# EAGLE board FM_player_v2 (EAGLE 6.1)
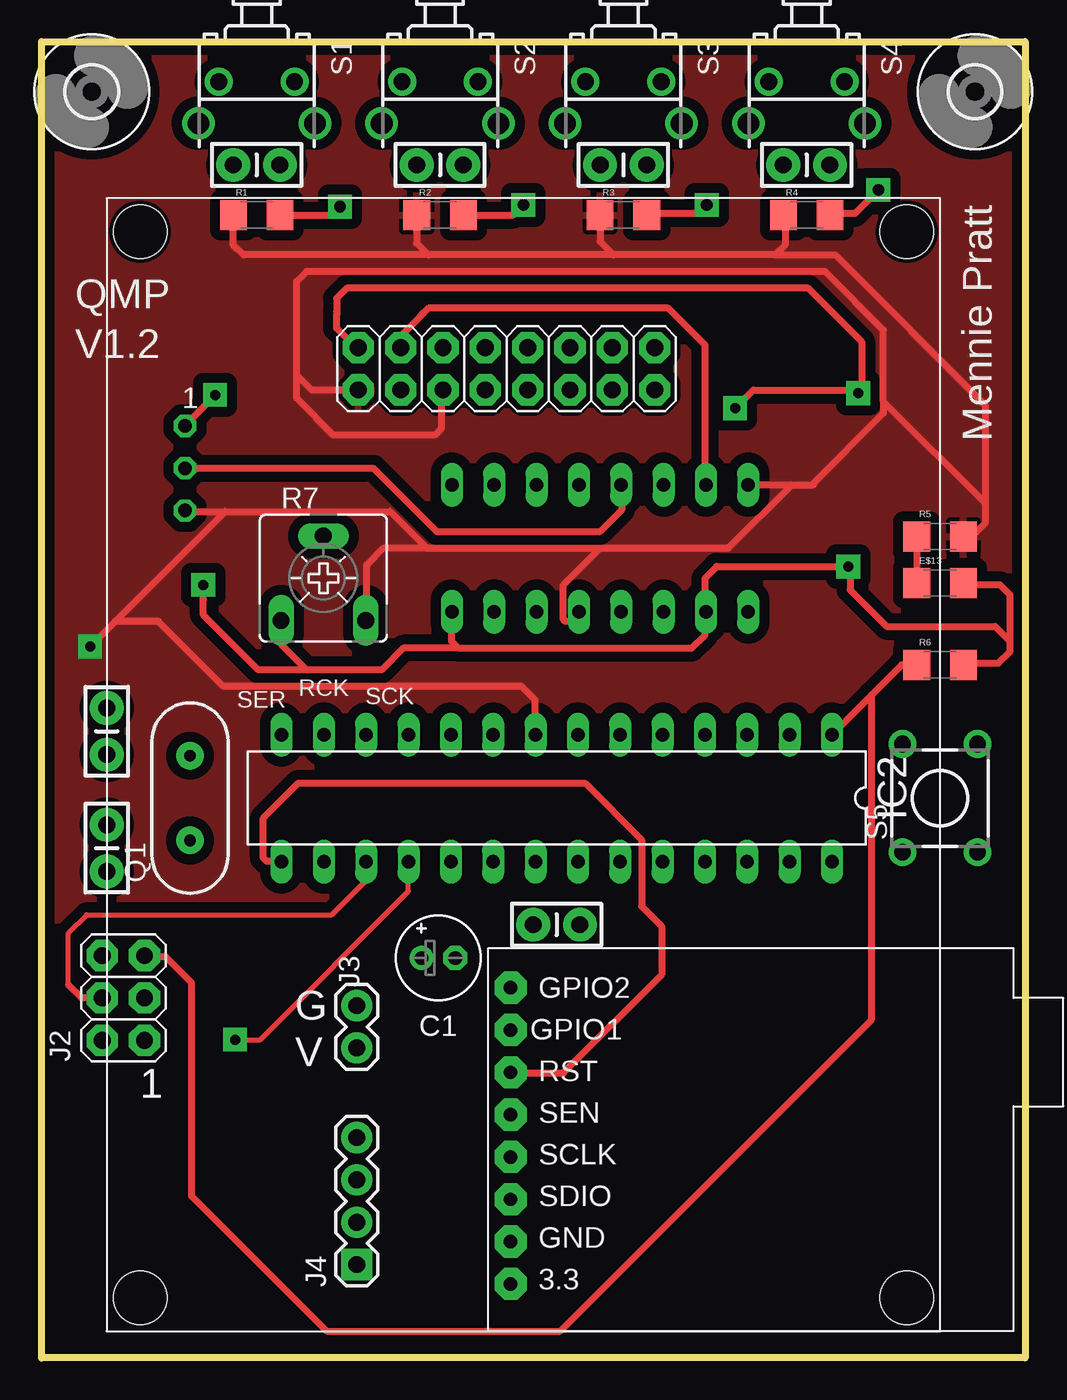
[diagram p0: board, top side]
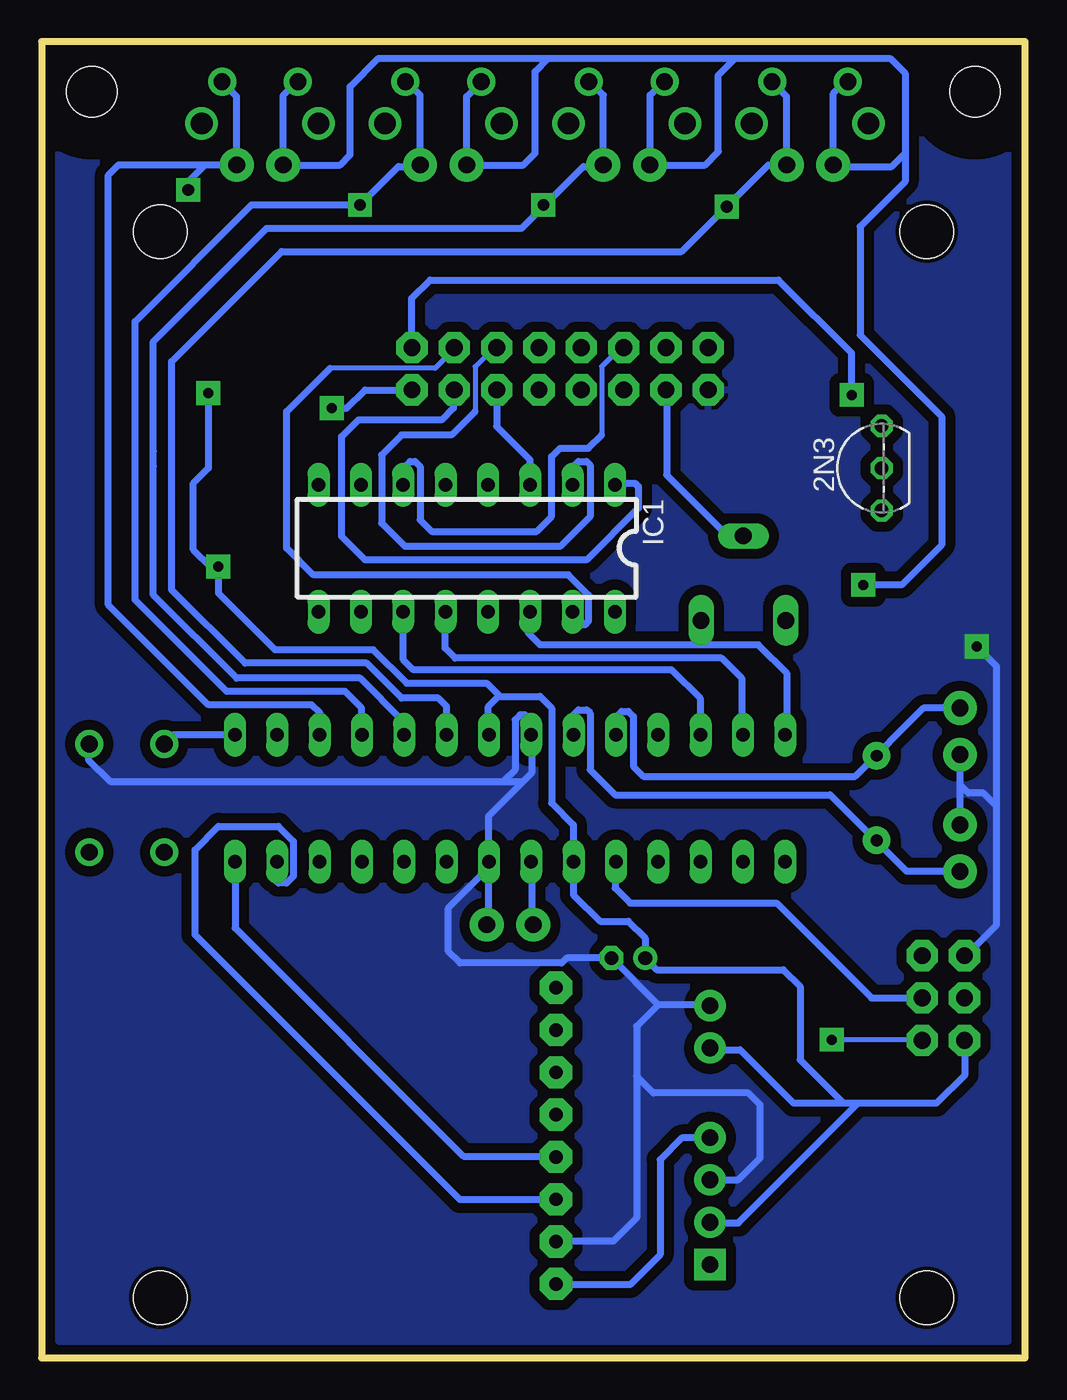
[diagram p1: board, bottom side, seen from below]

Size 59 x 79 mm. Coordinates in mm from the lower left corner, seen from the top.
Outline: 0,0 0,79 59,79 59,0 0,0
Copper layers (1*16): Top 0.035mm / dielectric 1.5mm / Bottom 0.035mm
Design rules: minimum track width 6mil, minimum drill 12mil, track to track 24mil, track to pad 24mil, pad to pad 24mil, via to via 24mil, smd to smd 24mil, copper to edge 10mil, drill to drill 10mil, minimum pad ring 10mil, minimum via ring 6mil, stop-mask expansion 2mil, vias tented up to drill 100mil, thermal gap 10mil

## Footprints (pad centres in the part's own frame; a part is rotated, then mirrored left to right if it is on the bottom)
TO92- = drill 0.813 octagon: 1 -2.54,0; 2 0,0; 3 2.54,0
E2-5 = drill 0.813 pad 1.422: + -1.016,0 | drill 0.813 pad 1.422 octagon: - 1.016,0
CAP-PTH-SMALL-KIT = drill 1.016 pad 2.032: 1 -1.397,0; 2 1.397,0
3,0 = hole 3: 0,0
LIPO_RIDER_PRO = hole 3.2: -23,-32; -23,32; 23,32; 23,-32
1206 = smd 1.6 x 1.8: 1 -1.4,0; 2 1.4,0
SI4703_MODULE = drill 0.8 pad 1.93 octagon: P$1 -10.16,10.16; P$2 -7.62,10.16; P$3 -5.08,10.16; P$4 -2.54,10.16; P$5 0,10.16; P$6 2.54,10.16; P$7 5.08,10.16; P$8 7.62,10.16
DIL16 = drill 0.813 long: 1 -8.89,-3.81; 2 -6.35,-3.81; 3 -3.81,-3.81; 4 -1.27,-3.81; 5 1.27,-3.81; 6 3.81,-3.81; 7 6.35,-3.81; 8 8.89,-3.81; 9 8.89,3.81; 10 6.35,3.81; 11 3.81,3.81; 12 1.27,3.81; 13 -1.27,3.81; 14 -3.81,3.81; 15 -6.35,3.81; 16 -8.89,3.81
DIL28-3 = drill 0.813 long: 1 -16.51,-3.81; 2 -13.97,-3.81; 3 -11.43,-3.81; 4 -8.89,-3.81; 5 -6.35,-3.81; 6 -3.81,-3.81; 7 -1.27,-3.81; 8 1.27,-3.81; 9 3.81,-3.81; 10 6.35,-3.81; 11 8.89,-3.81; 12 11.43,-3.81; 13 13.97,-3.81; 14 16.51,-3.81; 15 16.51,3.81; 16 13.97,3.81; 17 11.43,3.81; 18 8.89,3.81; 19 6.35,3.81; 20 3.81,3.81; 21 1.27,3.81; 22 -1.27,3.81; 23 -3.81,3.81; 24 -6.35,3.81; 25 -8.89,3.81; 26 -11.43,3.81; 27 -13.97,3.81; 28 -16.51,3.81
2X8 = drill 1.016 pad 1.88 octagon: 1 0,0; 2 0,2.54; 3 2.54,0; 4 2.54,2.54; 5 5.08,0; 6 5.08,2.54; 7 7.62,0; 8 7.62,2.54; 9 10.16,0; 10 10.16,2.54; 11 12.7,0; 12 12.7,2.54; 13 15.24,0; 14 15.24,2.54; 15 17.78,0; 16 17.78,2.54
2X03 = drill 1.016 pad 1.88 octagon: 1 -2.54,-1.27; 2 -2.54,1.27; 3 0,-1.27; 4 0,1.27; 5 2.54,-1.27; 6 2.54,1.27
1X02 = drill 1.016 pad 1.88: 1 0,0; 2 2.54,0
1X04 = drill 1.016 pad 1.88 square: 1 0,0 | drill 1.016 pad 1.88: 2 2.54,0; 3 5.08,0; 4 7.62,0
HC49US = drill 0.7 pad 1.651: 1 -2.54,0; 2 2.54,0
CA6V = drill 1.016 long: A -2.54,-2.54; E 2.54,-2.54; S 0,2.54
TL1105JA = drill 1 pad 1.676: 1 -2.275,0; 2 2.275,0 | drill 1.3 pad 1.9: 3 -3.5,2.5; 4 3.5,2.5
TL1105 = drill 1 pad 1.676: 1 -2.25,3.25; 2 2.25,3.25; 3 -2.25,-3.25; 4 2.25,-3.25

## Placement (x,y rotation side)
2N3  2N7000  [TO92-]  8.6,53.4 90 bottom
C1  [E2-5]  23.8,24 0 top
C2  0.1uF  [CAP-PTH-SMALL-KIT]  12.9,71.6 0 top
C3  0.1uF  [CAP-PTH-SMALL-KIT]  23.9,71.6 0 top
C4  0.1uF  [CAP-PTH-SMALL-KIT]  34.9,71.6 0 top
C5  0.1uF  [CAP-PTH-SMALL-KIT]  45.9,71.6 0 top
C6  0.1uF  [CAP-PTH-SMALL-KIT]  30.9,26 0 top
C7  22pF  [CAP-PTH-SMALL-KIT]  3.9,37.6 90 top
C8  22pF  [CAP-PTH-SMALL-KIT]  3.9,30.6 90 top
E$1  [3,0]  3,76 0 top
E$2  [3,0]  56,76 0 top
E$5  [LIPO_RIDER_PRO]  28.9,35.6 0 top
E$13  [1206]  53.9,46.5 0 top
E$27  Si4703 Evaluation Board  [SI4703_MODULE]  38.3,14.6 90 top
IC1  [DIL16]  33.5,48.6 180 bottom
IC2  [DIL28-3]  30.9,33.6 180 top
J1  LCD HD44780 8x2  [2X8]  19,58.1 0 top
J2  2x3 ICSP Male  [2X03]  4.9,21.6 90 top
J3  VIN From Lipo Rider  [1X02]  18.9,18.6 90 top
J4  Pololu Variable reg 3.3V Out  [1X04]  18.9,5.6 90 top
Q1  [HC49US]  8.9,33.6 90 top
R1  10K  [1206]  12.9,68.6 0 top
R2  10K  [1206]  23.9,68.6 0 top
R3  10K  [1206]  34.9,68.6 0 top
R4  10K  [1206]  45.9,68.6 0 top
R5  330  [1206]  53.9,49.3 0 top
R6  10K  [1206]  53.9,41.6 0 top
R7  10K  [CA6V]  16.9,46.8 0 top
S1  Menu  [TL1105JA]  12.9,76.6 180 top
S2  Select  [TL1105JA]  23.9,76.6 180 top
S3  Up  [TL1105JA]  34.9,76.6 180 top
S4  Down  [TL1105JA]  45.9,76.6 180 top
S5  [TL1105]  53.9,33.6 0 top

## Library data of the parts
2N3 = maxim
C1 = adafruit
C2-C8 E$13 IC1 J1-J4 Q1 R1-R6 = SparkFun
E$1 E$2 = holes
E$5 E$27 = Quinton
IC2 = atmel
R7 = pot
S1-S5 = switch

## Nets
GND: J1.1 R2.1 R3.1 R5.2
S$7: R5.1
S$10: R6.1
S$11: R2.2
S$52: J1.11
S$57: 2N3.2

## Tracks (layer width: path | path; a pad name or v marks a point on that pad's centre or on a via)
GND  (via drill 0.6 pad 1.42)
  Top 0.406: 29.6,37.4 29.6,39.5 28.8,40.3 10.9,40.3 7,44.2 4.4,44.2 | 15.3,59 15.3,57.6 17.5,55.4 23.6,55.4 24,55.8 24,58.1 | 15.3,59 15.3,64.6 15.9,65.2 47,65.2 50.5,61.7 50.5,57.4 | 46.2,52.4 46.3,52.4 | 45,52.4 42.4,52.4 | 45,52.4 46.2,52.4 | 45,52.4 41.2,48.6 33.5,48.6 | 23.1,48.6 33.5,48.6 | 23.1,48.6 20.9,50.8 11,50.8 | 8.7,50.8 11,50.8 | 46.2,52.4 50.5,56.7 50.5,57.4 | 44.6,68.6 44.6,66.8 44,66.2 | 44,66.2 34.3,66.2 | 34.3,66.2 23.2,66.2 | 23.2,66.2 12.1,66.2 11.5,66.8 11.5,68.4 | R2.1 22.5,66.9 23.2,66.2 | R3.1 33.5,67 34.3,66.2 | 44,66.2 47.6,66.2 56.6,57.2 56.6,51.3 | 56.6,51.3 56.6,50.1 55.8,49.3 R5.2 | 50.5,57.4 56.6,51.3 | 23.1,48.6 20.5,48.6 19.5,47.6 19.5,44.2 | 11,50.8 4.4,44.2 | 4.4,44.2 v2.9,42.7 | 33.5,48.6 31.3,46.4 31.3,44.3 31.4,44.2 32.1,44.2 32.2,44.3 32.2,44.8 | J1.1 16.2,58.1 15.3,59
  Bottom 0.406: 3.7,24.1 3.6,24.1 1.7,26 1.7,33.1 | 1.7,33.1 2.5,33.9 3.4,33.9 3.9,34.4 | 3.9,32 3.9,34.4 | 3.9,34.4 3.9,36.2 | 1.7,33.1 1.7,41.5 v2.9,42.7 | 18.9,10.7 17.2,10.7 15.9,12 15.9,15.2 16.6,15.9 22.3,15.9 23.3,16.9 | 22,21.2 23.3,19.9 23.3,16.9 | 23.3,16.9 23.3,8.4 24.7,7 28.1,7 | 18.9,21.2 22,21.2 | 22,21.2 24.8,24 27.5,24 27.8,23.7 33.9,23.7 34.6,24.4 34.6,27 32.2,29.4 | 56.2,36.9 56.2,35.9 54.9,34.6 31.3,34.6 | 31.3,34.6 30.1,34.6 | 30.1,34.6 29.6,35.1 29.6,38.2 30,38.6 30.3,38.6 30.6,38.3 30.6,35.3 31.3,34.6 | 30.1,34.6 32.2,32.5 32.2,29.4 | 32.2,29.4 32.2,26.1 32.3,26
  pour Top: 1,78 58,78 58,1 1,1
  pour Bottom: 1,78 58,78 58,1 1,1
S$1  (via drill 0.6 pad 1.42)
  Top 0.406: 19,60.6 18.9,60.6 17.7,61.8 17.7,62.6 17.7,62.8 17.7,63.6 18.3,64.2 46,64.2 49.2,61 49.2,58.1 v49,57.9 48.8,58.1 42.7,58.1 v41.6,57 | v48.4,47.5 40.5,47.5 39.8,46.8 39.8,44.8
  Bottom 0.406: 36.8,58.1 39.6,58.1 40.7,57 v41.6,57 | v49,57.9 49,53.4 49.9,52.5 49.9,48.5 48.9,47.5 v48.4,47.5 48.4,45.9 45,42.5 39.1,42.5 37.1,40.5 32.3,40.5 31.5,39.7 | 32.2,37.4 32.2,39.1 31.6,39.7 31.5,39.7 | 31.5,39.7 29.1,39.7 28.4,39 28.4,33.3 27.1,32 27.1,27.8 25.5,26.2 23.8,26.2 22.8,25.2 22.8,24 22.1,23.3 14.5,23.3 13.5,22.3 13.5,17.9 10.9,15.3 | 18.9,18.5 17.1,18.5 13.9,15.3 10.9,15.3 | 3.6,19.1 3.6,17 5.3,15.3 10,15.3 | 10.9,15.3 10,15.3 | 18.9,8.1 17.2,8.1 10,15.3
S$2
  Bottom 0.406: 18.9,13.2 20.6,13.2 21.9,11.9 21.9,6.2 23.7,4.4 28.2,4.4
S$4
  Bottom 0.305: 31.7,60.6 31.9,60.6 33,59.5 33,56.8
  Bottom 0.406: 33,56.8 34.4,55.4 37.4,55.4 38.6,54.2 38.6,50.1 37.2,48.7 27.9,48.7 26.1,50.5 26.1,53.6 26.3,53.8 26.8,53.8 27.1,53.5 27.1,53.3 27.1,53.1 27.1,52.4
S$5
  Top 0.406: 14.4,29.8 13.5,29.8 13.3,30 13.3,32.4 15.4,34.5 32.6,34.5 36,31.1 36,27.1 37.2,25.9 37.2,23 31.3,17.1 28.1,17.1
S$6
  Bottom 0.406: 33.5,71.6 33.5,75.7 32.6,76.6
S$7
  Top 0.406: R5.1 52.5,46.8
S$9
  Bottom 0.406: 24.7,52.5 23.4,52.5 23.2,52.3 23.2,51 26.3,47.9 39.6,47.9 41,49.3 41,55.3 40,56.3 35,56.3 34.3,57 34.3,58.1
S$10
  Top 0.406: R6.1 51.6,41.6 49.8,39.8 | 49.8,39.8 47.4,37.4 | 49.8,39.8 49.8,20.3 31.1,1.6 17.1,1.6 9,9.7 9,22.5 7.4,24.1 6.2,24.1
S$11  (via drill 0.7 pad 1.42)
  Top 0.406: R2.2 28.3,68.6 v28.9,69.2
S$12  (via drill 0.7 pad 1.42)
  Top 0.406: 36.3,68.7 39.4,68.7 v39.9,69.2
  Bottom 0.406: 39.8,37.4 39.8,39 40.8,40 47.9,40 53.4,45.5 53.4,62.2 46.4,69.2 v39.9,69.2 37.6,71.5 36.4,71.5 36.3,71.6 36.3,75.8 37.2,76.7
S$14
  Bottom 0.406: 47.4,37.4 51.1,37.4 51.6,36.9
S$17  (via drill 0.7 pad 1.42)
  Top 0.406: 47.4,68.7 48.8,68.7 v50.2,70.1
  Bottom 0.406: 42.3,37.4 42.3,38.7 42.8,39.2 49,39.2 55,45.2 55,71 54.4,71.6 49.2,71.6 | 48.2,76.6 47.3,75.7 47.3,71.6 49.2,71.6 | v50.2,70.1 50.2,70.6 49.2,71.6
S$18
  Bottom 0.406: 24.6,37.5 24.6,38.4 24.2,38.8 23.8,38.8 23.5,38.5 23.5,35.5 22.9,34.9 10.2,34.9 6.1,39 3.9,39
S$19
  Bottom 0.406: 27.1,37.5 27.1,38.6 26.8,38.9 26.3,38.9 26.1,38.7 26.1,35.3 24.6,33.8 11.7,33.8 7.1,29.2 3.9,29.2
S$21
  Bottom 0.406: 28.1,9.5 33.9,9.5 49.8,25.4 49.8,30.5 48.4,31.9 44.8,31.9 43.9,31 43.9,28.9 44.3,28.5 44.8,28.5 44.9,28.6 44.9,29.8
S$22
  Bottom 0.406: 29.6,29.8 29.6,26.1 29.5,26
S$25
  Bottom 0.406: 6.2,21.6 9.2,21.6 14.9,27.3 23.7,27.3 24.6,28.2 24.6,29.8
S$26
  Top 0.406: 48.5,47.5 48.5,46.1 50.7,43.9 57.2,43.9 58.1,43 | 55.3,41.7 57.4,41.7 58.1,42.4 58.1,43 | 58.1,43 58.1,45.8 57.5,46.4 55.2,46.4
S$27
  Bottom 0.406: 28.1,12.1 33.7,12.1 47.4,25.8 47.4,29.8
S$30  (via drill 0.7 pad 1.42)
  Top 0.406: 14.4,68.6 17.4,68.6 v17.9,69.1
  Bottom 0.406: 34.7,37.4 34.7,39.1 35.2,39.6 37.4,39.6 39.5,41.7 46.8,41.7 51.2,46.1 51.2,59.8 44.6,66.4 20.6,66.4 v17.9,69.1 15.4,71.6 14.3,71.6 14.3,75.7 15.2,76.6
S$31  (via drill 0.6 pad 1.42)
  Top 0.406: 39.8,44.7 39.8,43.4 39,42.6 25,42.6 | 24.6,44.8 24.6,43 25,42.6 | 9.7,45.5 v9.7,46.4 9.7,44.6 13,41.3 15.9,41.3 | 25,42.6 21.7,42.6 20.4,41.3 15.9,41.3 | 14.4,44.3 14.4,42.8 15.9,41.3
  Bottom 0.406: 33.6,71.6 30.1,71.6 29.4,72.3 29.4,77.2 28.6,78 | 21.7,76.6 22.5,75.8 22.5,71.6 19.2,71.6 18.4,72.4 18.4,77 17.4,78 | 10.7,76.7 11.5,75.9 11.5,71.5 8,71.5 7.2,72.3 | 43.7,76.6 44.5,75.8 44.5,71.6 41.1,71.6 40.5,72.2 40.5,76.3 38.8,78 28.6,78 | 28.6,78 17.4,78 | 17.4,78 8.1,78 7.2,77.1 7.2,72.3 | v9.7,46.4 7.4,46.4 5,48.8 5,56.5 9.9,61.4 9.9,67.9 7.2,70.6 7.2,72.3
S$45
  Bottom 0.406: 37.3,37.3 37.3,38.2 39.9,40.8 47.3,40.8 52.3,45.8 52.3,53.5 52.3,54.4 52.3,61 46.6,66.7 46.2,67.1 45.5,67.8 30.2,67.8 26.5,71.5 25.4,71.5 25.3,71.6 25.3,75.8 26.2,76.7
S$48  (via drill 0.6 pad 1.42)
  Top 0.305: v11.6,19.1 13.1,19.1 22,28 22,29.8
  Bottom 0.305: 6.2,19.1 7.8,19.1 9,19.1 v11.6,19.1
S$50
  Top 0.305: 1.6,22.4 1.6,25.5 2.7,26.6 17.4,26.6 19.5,28.7 19.5,29.8
  Top 0.406: 3.6,21.6 2.4,21.6 1.6,22.4
S$52
  Bottom 0.406: 29.7,52.4 29.7,53.9 31.7,55.9 J1.11
S$53
  Bottom 0.406: 37.3,44.8 37.3,41.9 36.7,41.3 21.2,41.3 19.5,39.6 19.5,37.4
S$54
  Bottom 0.406: 29.7,44.8 29.8,44.7 29.8,43.5 29.1,42.8 16,42.8 14.3,41.1 14.3,37.5 14.4,37.4
S$56
  Bottom 0.406: 34.8,44.8 34.8,42.6 34.2,42 18.2,42 17,40.8 17,37.6 16.9,37.5
S$57
  Top 0.406: 34.8,52.4 34.8,50.9 33.5,49.6 23.7,49.6 20.4,52.9 19.9,53.4 2N3.2
S$60
  Bottom 0.406: 21.5,58.1 21.5,53 17.8,49.3 16.9,49.3
S$61
  Top 0.406: 39.8,52.4 39.8,60.8 37.6,63 23.2,63 22.9,62.7 22.7,62.5 21.5,61.3 21.5,60.6
S$63
  Bottom 0.305: 24.1,60.6 24.3,60.6 25.4,59.5 25.4,55.4
  Bottom 0.406: 25.4,55.4 26.2,54.6 27.9,54.6 28.4,54.1 28.4,50.5 29.3,49.6 35.6,49.6 36.3,50.3 36.3,53.5 36.6,53.8 36.9,53.8 37.1,53.6 37.3,53.4 37.3,52.4
S$64
  Bottom 0.305: 34.2,60.6 35.4,59.4 41.7,59.4
  Bottom 0.406: 41.7,59.4 44.3,56.8 44.3,48.6 42.7,47 27.4,47 26.2,45.8 26.2,44.2 26.4,44 27,44 27.1,44.1 27.1,44.9
S$67
  Bottom 0.406: 8.7,56.1 8.6,56
S$68  (via drill 0.6 pad 1.42)
  Top 0.406: 8.6,56 v10.4,57.8
  Bottom 0.406: 36.8,60.7 36.8,63.6 35.7,64.7 14.8,64.7 10.4,60.3 v10.4,57.8

## Text on the board
tPlace: 1 | RCK | SER | SCK
tNames: QMP | V1.2 | Mennie Pratt | G | V | 1